# Altium PCB PCB2.PcbDoc
Units mil, origin at the board's own origin, x right, y up, seen from the top; angles counter-clockwise.
Board outline 6000 x 4000 mil, 2 copper layers (Top Layer, Bottom Layer); 19 components, 17 nets, 59 pads, 0 vias.
Unrouted connection lines stored in the file: 40.
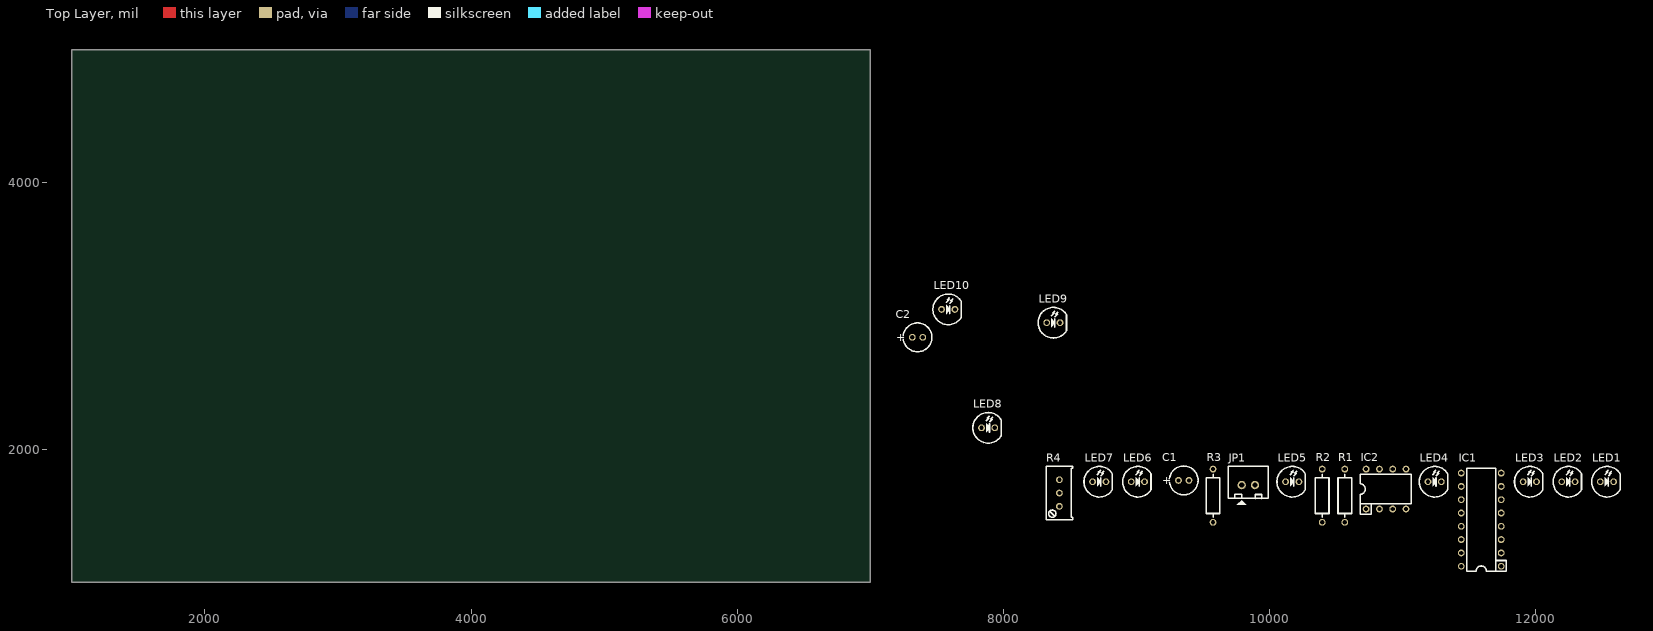
[diagram p0: Top Layer view]
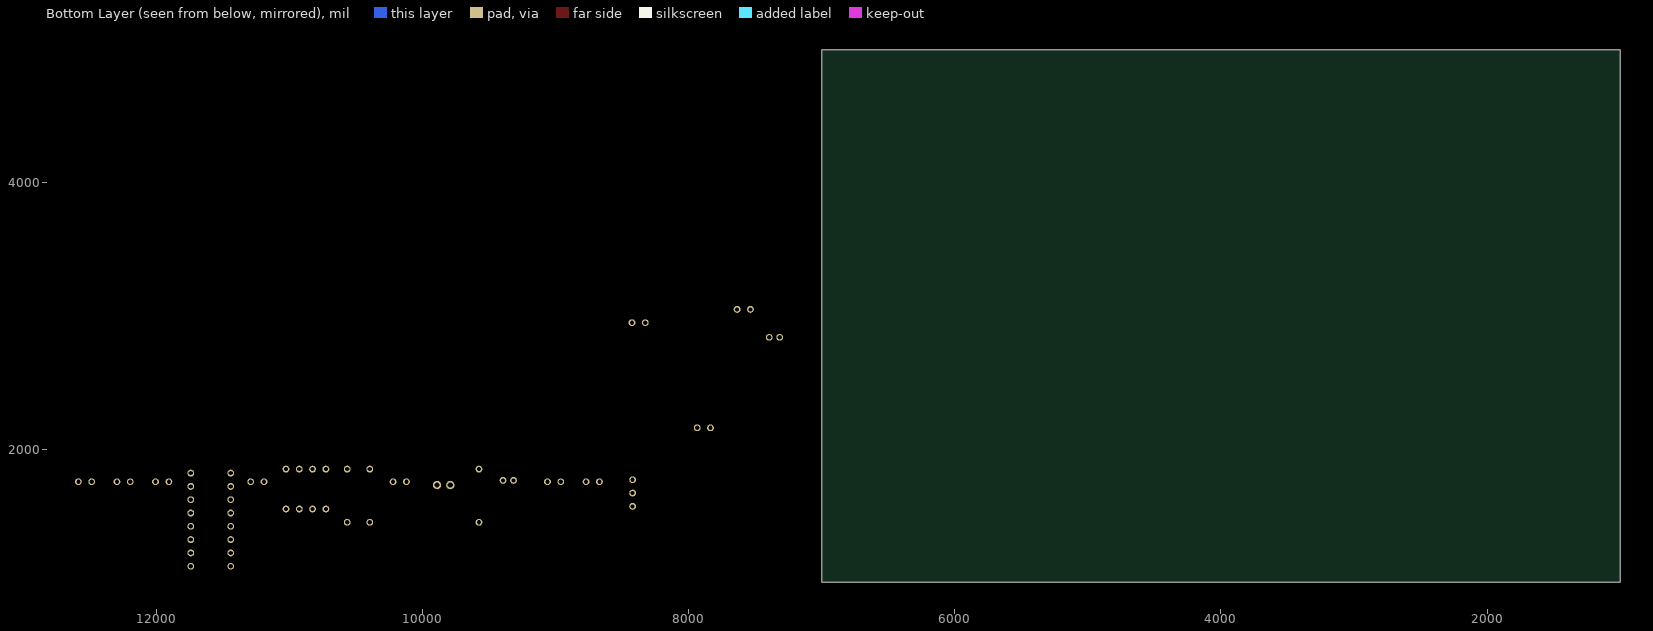
[diagram p1: Bottom Layer view, seen from below]

## Layer stack, top to bottom
Top Solder: solder mask 0.4, Solder Resist, Dk 3.5
Top Layer: signal copper 1.4
Dielectric 1: dielectric 12.6, FR-4, Dk 4.8
Bottom Layer: signal copper 1.4
Bottom Solder: solder mask 0.4, Solder Resist, Dk 3.5

## Board outline
1000,1000 7000,1000 7000,5000 1000,5000

## Design rules (kind name [scope] priority, off if disabled: settings)
Clearance [All] p1: gap=10
PolygonConnect [All] p1: connectstyle=Relief reliefconductorwidth=10 reliefentries=4 polygonreliefangle="90 Angle" airgapwidth=10
RoutingVias [All] p1: holewidth=28 width=50 viastyle="Through Hole" minholewidth=28 minwidth=50 maxholewidth=28 maxwidth=50
SolderMaskExpansion [All] p1: expansion=4
Width [All] p1: maxlimit=10 minlimit=10 preferedwidth=10
30 further rules are at their usual default settings.

## Components (designator, comment, footprint, x,y, rotation, side; value= is the part's Value field where it differs from the comment)
C1 "GSR10M016-0511TAF" CAP_1UF_50V 9315,1765 r0 top
C2 "GSR10M016-0511TAF" CAP_1UF_50V 7315,2840 r0 top
IC1 "CD4017" 74HC4017 11740,1120 r90 top
IC2 "LM555" LM555 10725,1550 r0 top
JP1 "9VDC" CON2 9840,1730 r0 top
LED1 "LED_R_5" LED5R 12485,1755 r0 top
LED2 "LED_R_5" LED5R 12195,1755 r0 top
LED3 "LED_R_5" LED5R 11905,1755 r0 top
LED4 "LED_R_5" LED5R 11190,1755 r0 top
LED5 "LED_R_5" LED5R 10120,1755 r0 top
LED6 "LED_R_5" LED5R 8960,1755 r0 top
LED7 "LED_R_5" LED5R 8670,1755 r0 top
LED8 "LED_R_5" LED5R 7835,2160 r0 top
LED9 "LED_R_5" LED5R 8325,2950 r0 top
LED10 "LED_R_5" LED5R 7535,3050 r0 top
R1 "10K, 1/4W" "RES 1/4W CFR25" 10565,1450 r90 top
R2 "CF1/4W1KJ25" "RES 1/4W CFR25" 10395,1450 r90 top
R3 "CF1/4W1KJ25" "RES 1/4W CFR25" 9575,1450 r90 top
R4 "100K" VR1 8420,1570 r90 top

## Footprints (in the part's own frame and the unit in brackets; to place one, negate y for a bottom-side part, rotate by r counter-clockwise, add the part's x,y. Pads: shape width x height; smd on the part's side, far side on the other; paste and mask are expansions set on the pad)
74HC4017 [mm] "DIP 16, 16 PIN, W 7.62, Pin to pin 2.54MM"
  round 1.3 hole 0.8: 1(0,0) 2(2.54,0) 3(5.08,0) 4(7.62,0) 5(10.16,0) 6(12.7,0) 7(15.24,0) 8(17.78,0) 9(17.78,7.62) 10(15.24,7.62) 11(12.7,7.62) 12(10.16,7.62) 13(7.62,7.62) 14(5.08,7.62) 15(2.54,7.62) 16(0,7.62)
  silkscreen extent -0.95,-0.99 18.73,6.61, body extent -1.41,-0.07 19.19,7.69, height 4.5
CAP_1UF_50V [mm] "Capacitor, Electrolytic, Radial; Body 5 x 11 mm (Dia.xH typ); Pin Spacing 2 mm (typ)"
  round 1.3 hole 0.8: 1(0,0) 2(2,0)
  silkscreen extent -1.75,-2.75 3.75,2.75, body extent -1.53,-2.53 3.53,2.53, height 11.53
CON2 [mm] "CON2"
  round 1.6 hole 1 mask+0.1: 1(-1.27,0) 2(1.27,0)
  silkscreen extent -3.81,-3.8 3.81,3.56, body extent -3.75,-2.29 3.75,3.41, height 7
LED5R [mm] "LED, RED, 2 LEAD, 5mm"
  round 1.3 hole 0.8: 1(0,0) 2(2.54,0)
  silkscreen extent -1.65,-2.92 3.77,2.92, body extent -1.71,-3.01 3.71,3.01, height 12.31
LM555 [mm] "DIP 8, 8 PIN, W 7.62, Pin to pin 2.54MM"
  round 1.3 hole 0.8: 1(0,0) 2(2.54,0) 3(5.08,0) 4(7.62,0) 5(7.62,7.62) 6(5.08,7.62) 7(2.54,7.62) 8(0,7.62)
  silkscreen extent -1.15,-0.99 8.65,6.61, body extent -1.2,-0.1 8.7,7.72, height 4.57
"RES 1/4W CFR25" [mm] "Axial Device, Thru-Hole; 2 Leads fi 0.55"
  round 1.3 hole 0.8 mask+0.1: 1(0,0) 2(10.16,0)
  silkscreen extent 0.98,-1.3 9.18,1.3, body extent -0.3,-1.16 10.47,1.16, height 2.93
VR1 [mm] "Variable Resistor"
  round 1.3 hole 0.8 mask+0.1: 1(0,0) 2(2.54,0) 3(5.08,0)
  silkscreen extent -2.54,-2.54 7.65,2.54, body extent -2.22,-3.3 7.3,2.79, height 11.56

## Part data
C1 C2: "CAP GSR 0511 10uF 16V 20%"
IC1: library part 4017, "Decade Counter/Divider with 10 Decoded Outputs"
IC2: "Timer"
JP1: library part Con2, "Connector 2"
LED1 LED2 LED3 LED4 LED5 LED6 LED7 LED8 LED9 LED10: library part LED_RED_5MM, "LED Red 5mm"
R1: library part CF1/4W1KJ25, "RES CF AXIAL-0.3 5% 1/4W 1K"
R2 R3: "RES CF AXIAL-0.3 5% 1/4W 1K"
R4: library part VR2, "Var Resistor"

## Nets (pads, with @x,y where several pads share a name; then routed paths per layer and width w, separated by ;. In a path a pad name is that pad's centre, name@x,y a point inside that pad or via, vN(x,y) a via of type N, cw(c..) or ccw(c..) an arc to the next point about the centre after c; other vN are vias at no path point)
GND: C1.2 C2.2 IC1.8 IC1.13 IC1.15 IC2.1 JP1.2 R2.1
NetC2_1: C2.1 IC2.2 IC2.6 R4.3
NetIC1_1: IC1.1 LED6.1
NetIC1_2: IC1.2 LED2.1
NetIC1_3: IC1.3 LED1.1
NetIC1_4: IC1.4 LED3.1
NetIC1_5: IC1.5 LED7.1
NetIC1_6: IC1.6 LED8.1
NetIC1_7: IC1.7 LED4.1
NetIC1_9: IC1.9 LED9.1
NetIC1_10: IC1.10 LED5.1
NetIC1_11: IC1.11 LED10.1
NetIC1_14: IC1.14 R3.1
NetIC2_3: IC2.3 R3.2
NetIC2_7: IC2.7 R1.1 R4.1 R4.2
NetLED1_2: LED1.2 LED2.2 LED3.2 LED4.2 LED5.2 LED6.2 LED7.2 LED8.2 LED9.2 LED10.2 R2.2
VCC: C1.1 IC1.16 IC2.4 IC2.8 JP1.1 R1.2
pads on no net: IC1.12 IC2.5

## Text inside footprints (layer, text, board x,y; h text height)
C1: Top Overlay "+" at 9194.37,1735 h59.05; Mechanical 1 "2" at 9381.93,1745.32 h39.37; Mechanical 1 "1" at 9307.13,1745.32 h39.37; Mechanical 1 "+" at 9255.94,1745.32 h39.37
C2: Top Overlay "+" at 7194.37,2810 h59.05; Mechanical 1 "2" at 7381.93,2820.32 h39.37; Mechanical 1 "1" at 7307.13,2820.32 h39.37; Mechanical 1 "+" at 7255.94,2820.32 h39.37
IC1: Mechanical 1 "1" at 11704.17,1110.16 h39.37 r90; Mechanical 1 "8" at 11705.75,1801.1 h39.37 r90; Mechanical 1 "9" at 11515.98,1807.4 h39.37 r90; Mechanical 1 "16" at 11511.26,1106.22 h39.37 r90
IC2: Mechanical 1 "1" at 10715.16,1585.83 h39.37; Mechanical 1 "4" at 11010.43,1585.83 h39.37; Mechanical 1 "5" at 11010.43,1778.74 h39.37; Mechanical 1 "8" at 10711.22,1778.74 h39.37
JP1: Mechanical 1 "CN?" at 9840,1730 h31.5; Mechanical 1 "2" at 9879.37,1710.32 h39.37; Mechanical 1 "1" at 9784.88,1710.32 h39.37
R1: Mechanical 1 "R?" at 10565,1453.15 h19.68 r90
R2: Mechanical 1 "R?" at 10395,1453.15 h19.68 r90
R3: Mechanical 1 "R?" at 9575,1453.15 h19.68 r90
R4: Mechanical 1 "1" at 8439.29,1564.49 h39.37 r90; Mechanical 1 "2" at 8440.87,1658.19 h39.37 r90; Mechanical 1 "3" at 8440.08,1757.8 h39.37 r90